# Altium PCB NBP2 Altera Cyclone PQ208 Rev1.02.PcbDoc (part 1 of 2)
Units mm, origin at the board's own origin, x right, y up, seen from the top; angles counter-clockwise.
Board outline 69 x 80.99 mm, 2 copper layers (Top Layer, Bottom Layer); 52 components, 189 nets, 558 pads, 192 vias.
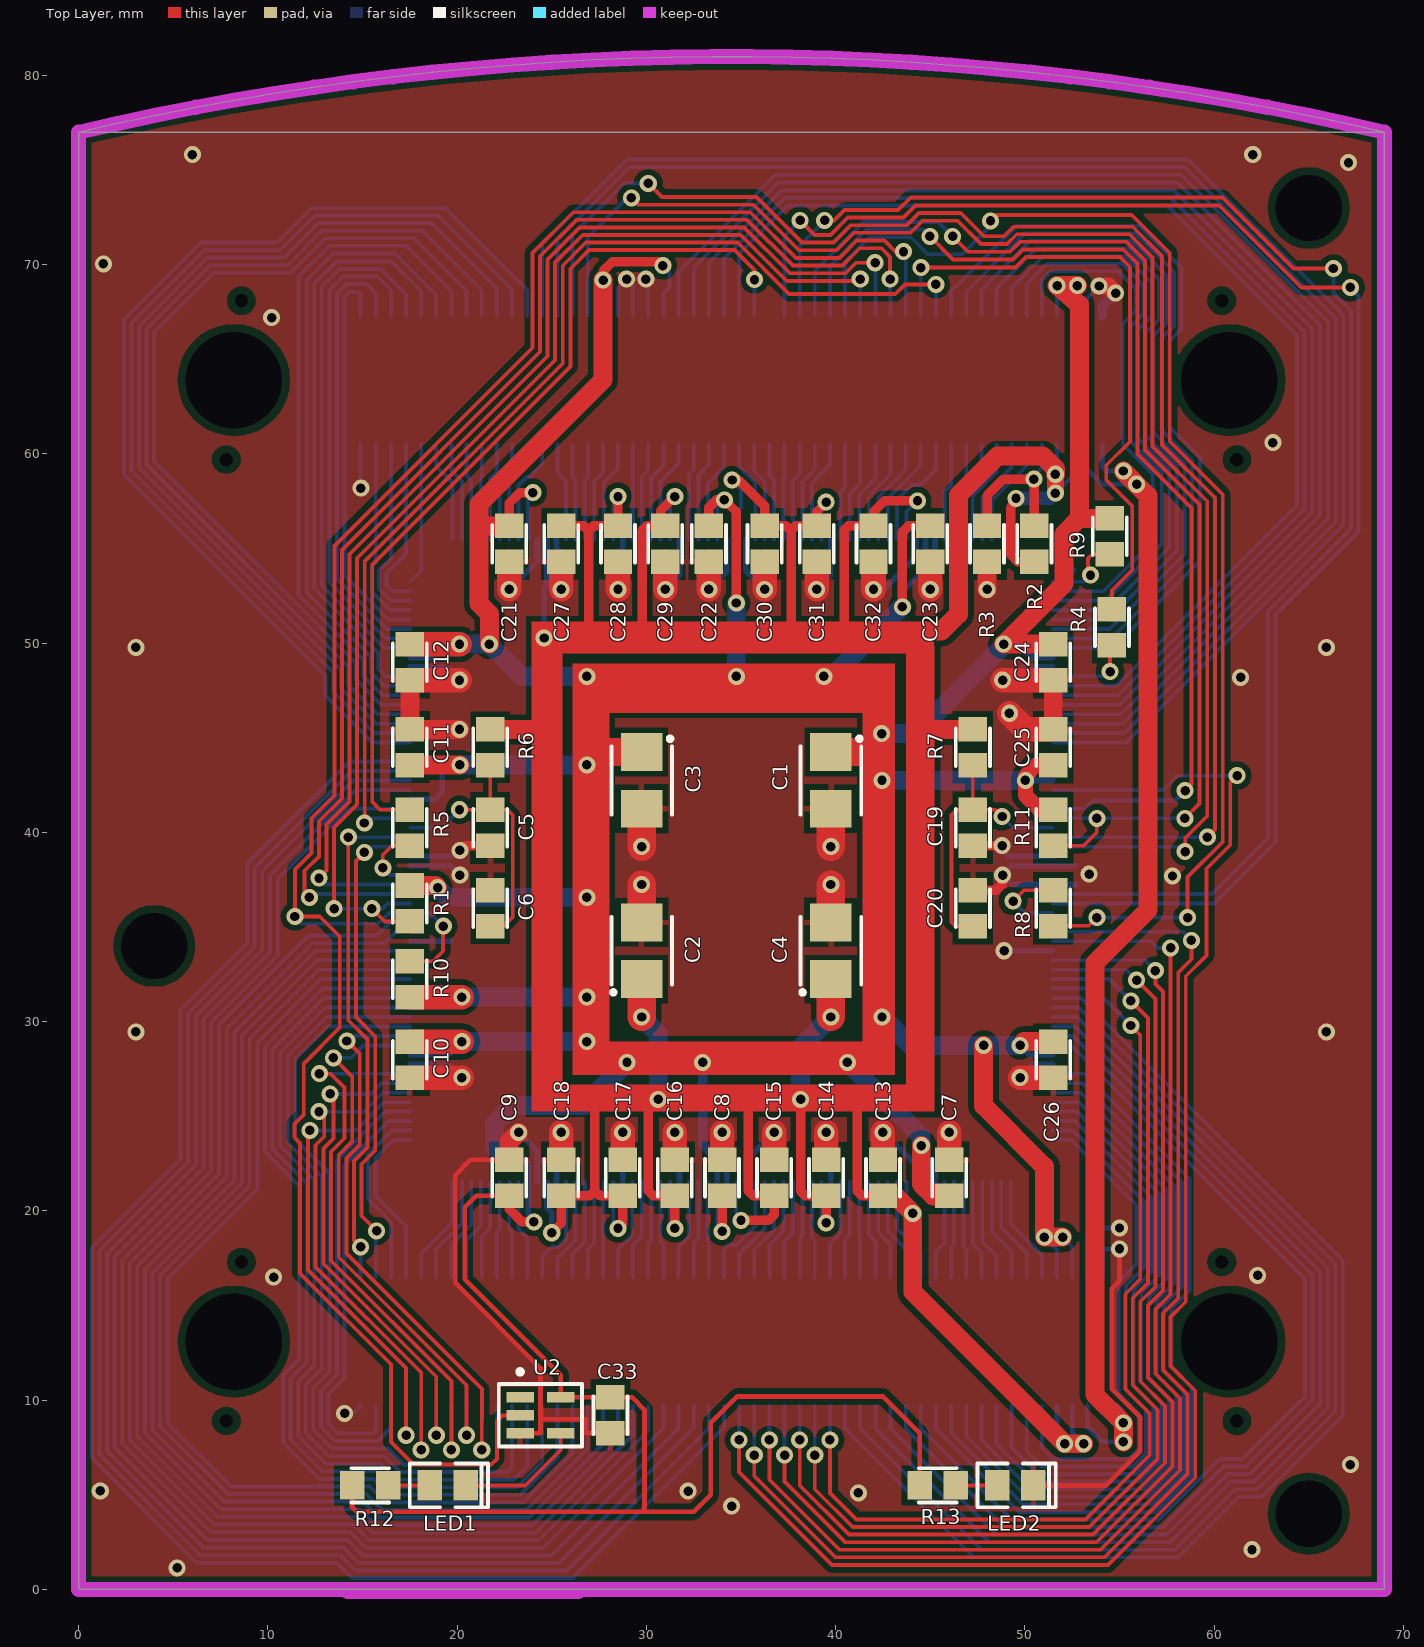
[diagram p0: Top Layer view]
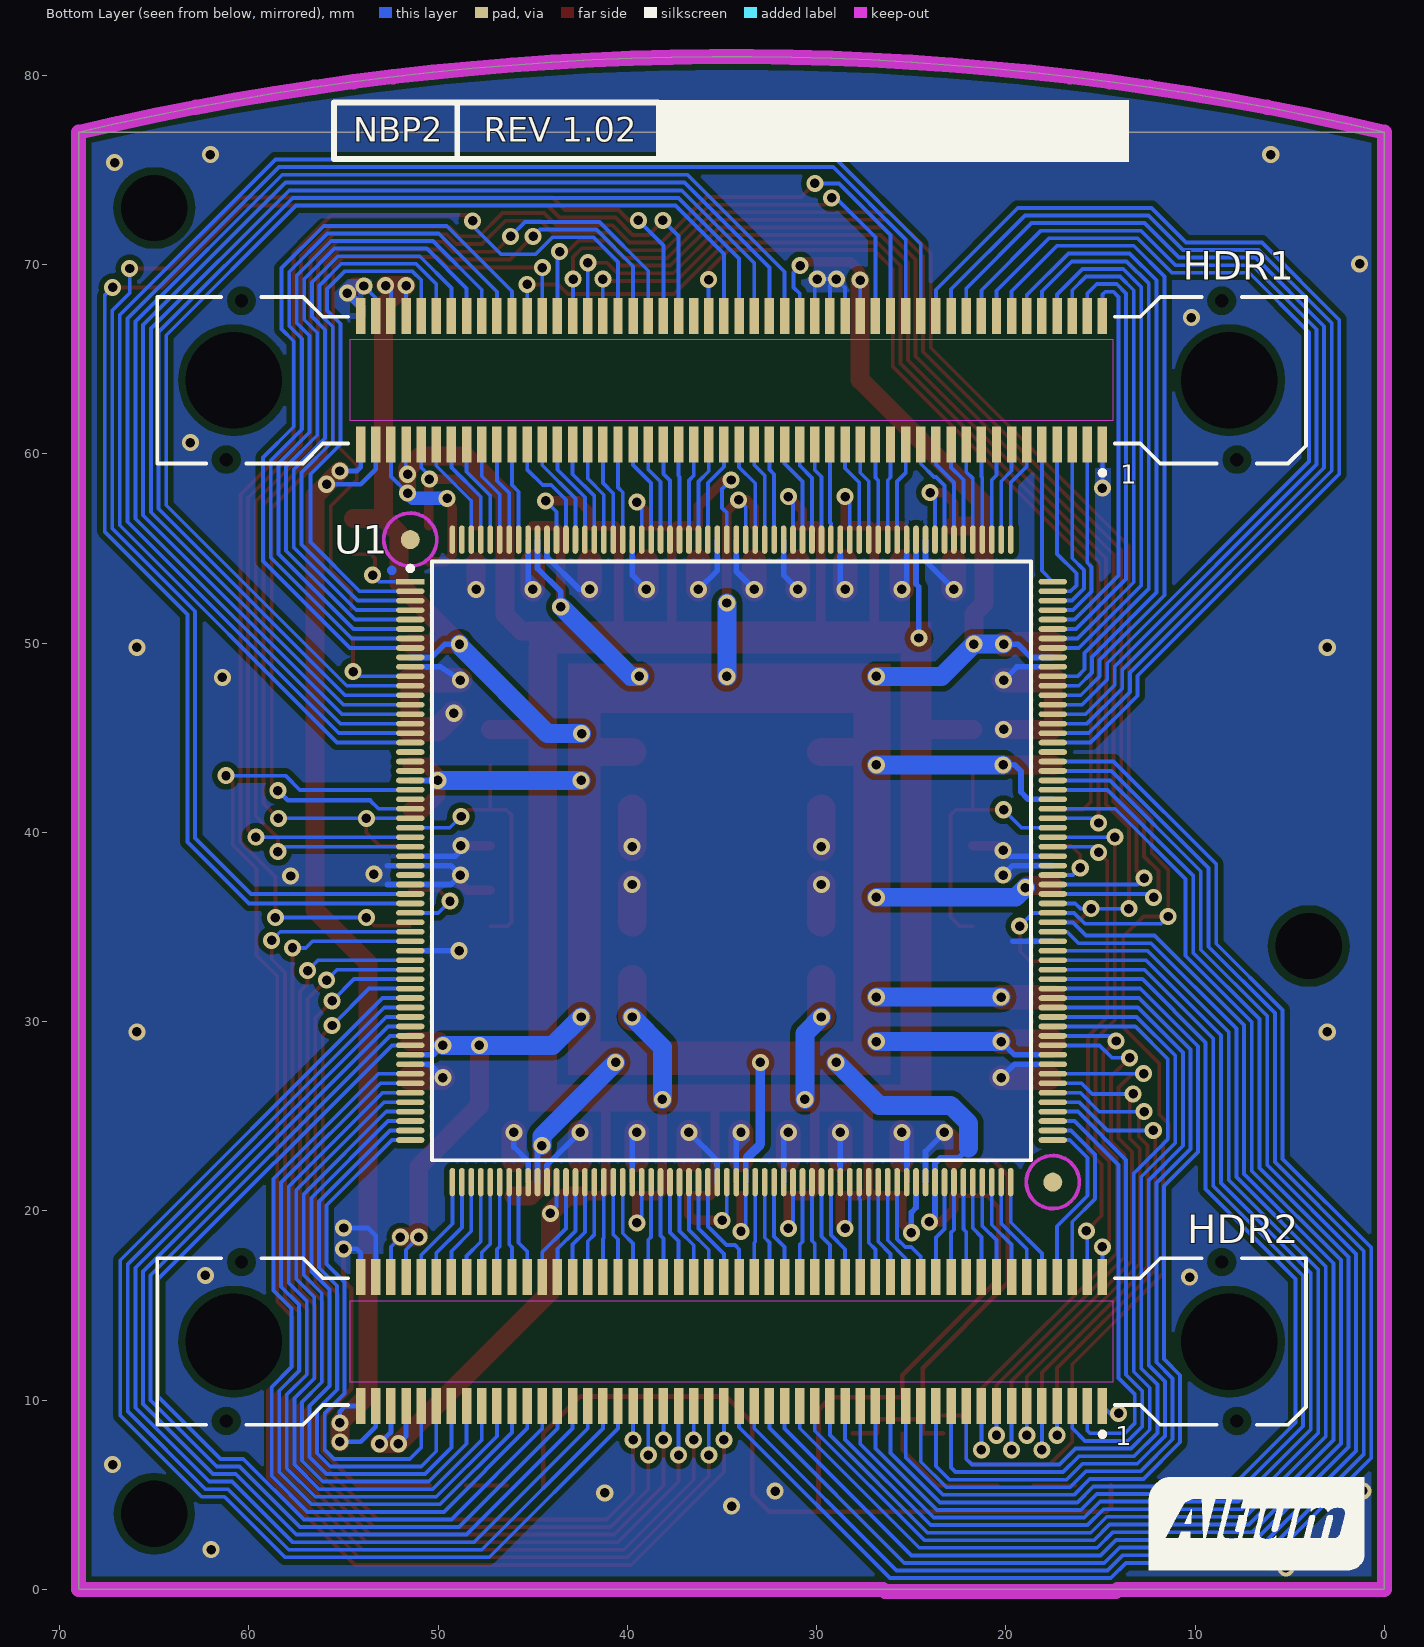
[diagram p1: Bottom Layer view, seen from below]

## Layer stack, top to bottom
Top Layer: signal copper 0.0356
Dielectric: core 0.32, FR-4, Dk 4.8
Bottom Layer: signal copper 0.0356

## Board outline
0,0 0,77 ccw(c0.001,77) 0.001,77 cw(c34.5,-69.801) 0.001,77 69,77 69,0

## Design rules (kind name [scope] priority, off if disabled: settings)
Clearance Clearance_Unplated_Pads [PadIsPlated = 'False'] p1: gap=0.4 // Slightly larger clearance around unplated holes
Clearance Clearance_Polygons [InPolygon] p2: gap=0.3
Clearance [All] p3: gap=0.2
ComponentClearance [All] p1: gap=0.2 collisioncheckmode=3 verticalgap=0.254 showdistances=FALSE
FabricationTestPointUsage TestPointUsage [All] p1 off: valid=0 allowmultiple=FALSE
FabricationTestpoint Testpoint [All] p1 off: side=3 testpointundercomponent=TRUE minsize=1.016 maxsize=2.54 preferedsize=1.524 minholesize=0 maxholesize=1.016 preferedholesize=0.813 testpointgrid=0.025 allowsidetop=TRUE allowsidebottom=TRUE usegrid=TRUE gridtolerance=0
HoleSize [All] p1: absolutevalues=TRUE maxlimit=5.2 minlimit=0.4 maxpercent=80.000 minpercent=20.000
PlaneClearance [All] p1: clearance=0.5
PlaneConnect [All] p1: planeconnectstyle=Relief reliefexpansion=0.5 reliefentries=4 reliefconductorwidth=0.25 reliefairgap=0.25
PolygonConnect PolygonConnect_Satellite_ID_Pads [InPadClass('Satellite ID Pads')] p1: connectstyle=NoConnect reliefconductorwidth=0.254 reliefentries=4 polygonreliefangle="90 Angle"
PolygonConnect [All] p2: connectstyle=Relief reliefconductorwidth=0.3 reliefentries=4 polygonreliefangle="90 Angle"
RoomDefinition BOCD_CycloneEPC12 [InComponentClass('BOCD_CycloneEPC12')] p1 off: confinementstyle=ConfineIn formatcopy=TRUE lockcomponents=FALSE outline 0,0 69,0 69,77 0,77
RoutingVias [All] p1: holewidth=0.5 width=0.9 viastyle="Through Hole" minholewidth=0.5 minwidth=0.9 maxholewidth=0.5 maxwidth=0.9
SMDNeckDown [All] p1: percent=100.000
SilkscreenOverComponentPads [All] p1: minsilkscreentomaskgap=0.254
SolderMaskExpansion SolderMaskExpansion_Vias [Isvia] p1: expansion=-0.46
SolderMaskExpansion [All] p2: expansion=0.1
Width Width_Power_Nets [InNetClass('Power Nets')] p1: maxlimit=2.5 minlimit=0.15 preferedwidth=0.25 toplayer_prefwidth=0.15
Width [All] p2: maxlimit=1.5 minlimit=0.2 preferedwidth=0.2
21 further rules are at their usual default settings.

## Classes and differential pairs
pad class "Satellite ID Pads": HDR1-36 HDR1-38 HDR1-40
net class "Power Nets": 5V GND VCC VCCINT

## Components (designator, comment, footprint, x,y, rotation, side; value= is the part's Value field where it differs from the comment)
C1 "10uF" MCCT-B 39.75,42.75 r270 top
C2 "10uF" MCCT-B 29.75,33.75 r90 top
C3 "10uF" MCCT-B 29.75,42.75 r270 top
C4 "10uF" MCCT-B 39.75,33.75 r90 top
C5 "0.1uF" CC2012-0805 21.75,40.25 r270 top
C6 "0.001uF" CC2012-0805 21.75,36 r90 top
C7 "0.1uF" CC2012-0805 46,21.75 r90 top
C8 "0.1uF" CC2012-0805 34,21.75 r90 top
C9 "0.1uF" CC2012-0805 22.75,21.75 r90 top
C10 "0.1uF" CC2012-0805 17.5,28 r270 top
C11 "0.1uF" CC2012-0805 17.5,44.5 r90 top
C12 "0.1uF" CC2012-0805 17.5,49 r270 top
C13 "0.1uF" CC2012-0805 42.5,21.75 r90 top
C14 "0.1uF" CC2012-0805 39.5,21.75 r90 top
C15 "0.1uF" CC2012-0805 36.75,21.75 r90 top
C16 "0.1uF" CC2012-0805 31.5,21.75 r90 top
C17 "0.1uF" CC2012-0805 28.75,21.75 r90 top
C18 "0.1uF" CC2012-0805 25.5,21.75 r90 top
C19 "0.1uF" CC2012-0805 47.25,40.25 r90 top
C20 "0.001uF" CC2012-0805 47.25,36 r270 top
C21 "0.1uF" CC2012-0805 22.75,55.25 r90 top
C22 "0.1uF" CC2012-0805 33.3,55.25 r90 top
C23 "0.1uF" CC2012-0805 45,55.25 r90 top
C24 "0.1uF" CC2012-0805 51.5,49 r90 top
C25 "0.1uF" CC2012-0805 51.5,44.5 r270 top
C26 "0.1uF" CC2012-0805 51.5,28 r90 top
C27 "0.1uF" CC2012-0805 25.5,55.25 r90 top
C28 "0.1uF" CC2012-0805 28.5,55.25 r90 top
C29 "0.1uF" CC2012-0805 31,55.25 r90 top
C30 "0.1uF" CC2012-0805 36.25,55.25 r90 top
C31 "0.1uF" CC2012-0805 39,55.25 r90 top
C32 "0.1uF" CC2012-0805 42,55.25 r90 top
C33 "0.1uF" CC2012-0805 28.1,9.2 r270 top
HDR1 "54075-1009" 54075 34.5,63.9 r0 bottom locked
HDR2 "54075-1009" 54075 34.5,13.1 r0 bottom locked
LED1 "HSMG-C170" "SMD _LED" 19.5,5.5 r180 top locked
LED2 "HSMH-C170" "SMD _LED" 49.5,5.5 r180 top locked
R1 "4K7" CC2012-0805 17.5,36.25 r270 top
R2 "DO NOT INSTALL" CC2012-0805 50.5,55.25 r90 top
R3 "47R" CC2012-0805 48,55.25 r270 top
R4 "100R" CC2012-0805 54.6,50.85 r90 top
R5 "100R" CC2012-0805 17.5,40.25 r270 top
R6 "1R" CC2012-0805 21.75,44.5 r270 top
R7 "1R" CC2012-0805 47.25,44.5 r270 top
R8 "33R" CC2012-0805 51.5,36 r270 top
R9 "4K7" CC2012-0805 54.483,55.651 r270 top
R10 "4K7" CC2012-0805 17.5,32.25 r90 top
R11 "4K7" CC2012-0805 51.5,40.25 r270 top
R12 "270R" CC2012-0805 15.4,5.5 r0 top
R13 "270R" CC2012-0805 45.4,5.5 r0 top
U1 "Cyclone EP1C12Q240C8" F-QFP32X32-G240/P.5N(RS) 34.5,38.5 r180 bottom locked
U2 "SN74LVC1G04DBV" SO-G5/P.95 24.4,9.2 r270 top

## Footprints (in the part's own frame and the unit in brackets; to place one, negate y for a bottom-side part, rotate by r counter-clockwise, add the part's x,y. Pads: shape width x height; smd on the part's side, far side on the other; paste and mask are expansions set on the pad)
54075 [mm] "Connector; Docking Station, Receptacle; 100 Position; Vertical"
  rect 0.5x1.9 smd: 1(-19.6,3.4) 2(-19.6,-3.4) 3(-18.8,3.4) 4(-18.8,-3.4) 5(-18,3.4) 6(-18,-3.4) 7(-17.2,3.4) 8(-17.2,-3.4) 9(-16.4,3.4) 10(-16.4,-3.4) 11(-15.6,3.4) 12(-15.6,-3.4) 13(-14.8,3.4) 14(-14.8,-3.4) 15(-14,3.4) 16(-14,-3.4) 17(-13.2,3.4) 18(-13.2,-3.4) 19(-12.4,3.4) 20(-12.4,-3.4) 21(-11.6,3.4) 22(-11.6,-3.4) 23(-10.8,3.4) 24(-10.8,-3.4) 25(-10,3.4) 26(-10,-3.4) 27(-9.2,3.4) 28(-9.2,-3.4) 29(-8.4,3.4) 30(-8.4,-3.4) 31(-7.6,3.4) 32(-7.6,-3.4) 33(-6.8,3.4) 34(-6.8,-3.4) 35(-6,3.4) 36(-6,-3.4) 37(-5.2,3.4) 38(-5.2,-3.4) 39(-4.4,3.4) 40(-4.4,-3.4) 41(-3.6,3.4) 42(-3.6,-3.4) 43(-2.8,3.4) 44(-2.8,-3.4) 45(-2,3.4) 46(-2,-3.4) 47(-1.2,3.4) 48(-1.2,-3.4) 49(-0.4,3.4) 50(-0.4,-3.4) 51(0.4,3.4) 52(0.4,-3.4) 53(1.2,3.4) 54(1.2,-3.4) 55(2,3.4) 56(2,-3.4) 57(2.8,3.4) 58(2.8,-3.4) 59(3.6,3.4) 60(3.6,-3.4) 61(4.4,3.4) 62(4.4,-3.4) 63(5.2,3.4) 64(5.2,-3.4) 65(6,3.4) 66(6,-3.4) 67(6.8,3.4) 68(6.8,-3.4) 69(7.6,3.4) 70(7.6,-3.4) 71(8.4,3.4) 72(8.4,-3.4) 73(9.2,3.4) 74(9.2,-3.4) 75(10,3.4) 76(10,-3.4) 77(10.8,3.4) 78(10.8,-3.4) 79(11.6,3.4) 80(11.6,-3.4) 81(12.4,3.4) 82(12.4,-3.4) 83(13.2,3.4) 84(13.2,-3.4) 85(14,3.4) 86(14,-3.4) 87(14.8,3.4) 88(14.8,-3.4) 89(15.6,3.4) 90(15.6,-3.4) 91(16.4,3.4) 92(16.4,-3.4) 93(17.2,3.4) 94(17.2,-3.4) 95(18,3.4) 96(18,-3.4) 97(18.8,3.4) 98(18.8,-3.4) 99(19.6,3.4) 100(19.6,-3.4)
  round 0.5 hole 0.7 unplated: MH1(-26.7,4.2) MH2(-25.9,-4.2) MH3(26.7,4.2) MH4(25.9,-4.2)
  round 4.8 hole 5.1 unplated: MH5(-26.3,0) MH6(26.3,0)
  Top Layer keep-out region: -20.15,2.15 20.15,2.15 20.15,-2.15 -20.15,-2.15
  silkscreen extent -30.35,-4.4 30.35,5.02
CC2012-0805 [mm]
  rect 1.3x1.5 smd: 1(-0.95,0) 2(0.95,0)
  silkscreen extent -1,-0.9 1,0.9
F-QFP32X32-G240/P.5N(RS) [mm]
  rect 1.5x0.3 smd: 1(-16.975,14.75)
  oval 1.5x0.3 smd: 2(-16.975,14.25) 3(-16.975,13.75) 4(-16.975,13.25) 5(-16.975,12.75) 6(-16.975,12.25) 7(-16.975,11.75) 8(-16.975,11.25) 9(-16.975,10.75) 10(-16.975,10.25) 11(-16.975,9.75) 12(-16.975,9.25) 13(-16.975,8.75) 14(-16.975,8.25) 15(-16.975,7.75) 16(-16.975,7.25) 17(-16.975,6.75) 18(-16.975,6.25) 19(-16.975,5.75) 20(-16.975,5.25) 21(-16.975,4.75) 22(-16.975,4.25) 23(-16.975,3.75) 24(-16.975,3.25) 25(-16.975,2.75) 26(-16.975,2.25) 27(-16.975,1.75) 28(-16.975,1.25) 29(-16.975,0.75) 30(-16.975,0.25) 31(-16.975,-0.25) 32(-16.975,-0.75) 33(-16.975,-1.25) 34(-16.975,-1.75) 35(-16.975,-2.25) 36(-16.975,-2.75) 37(-16.975,-3.25) 38(-16.975,-3.75) 39(-16.975,-4.25) 40(-16.975,-4.75) 41(-16.975,-5.25) 42(-16.975,-5.75) 43(-16.975,-6.25) 44(-16.975,-6.75) 45(-16.975,-7.25) 46(-16.975,-7.75) 47(-16.975,-8.25) 48(-16.975,-8.75) 49(-16.975,-9.25) 50(-16.975,-9.75) 51(-16.975,-10.25) 52(-16.975,-10.75) 53(-16.975,-11.25) 54(-16.975,-11.75) 55(-16.975,-12.25) 56(-16.975,-12.75) 57(-16.975,-13.25) 58(-16.975,-13.75) 59(-16.975,-14.25) 60(-16.975,-14.75) 121(16.975,-14.75) 122(16.975,-14.25) 123(16.975,-13.75) 124(16.975,-13.25) 125(16.975,-12.75) 126(16.975,-12.25) 127(16.975,-11.75) 128(16.975,-11.25) 129(16.975,-10.75) 130(16.975,-10.25) 131(16.975,-9.75) 132(16.975,-9.25) 133(16.975,-8.75) 134(16.975,-8.25) 135(16.975,-7.75) 136(16.975,-7.25) 137(16.975,-6.75) 138(16.975,-6.25) 139(16.975,-5.75) 140(16.975,-5.25) 141(16.975,-4.75) 142(16.975,-4.25) 143(16.975,-3.75) 144(16.975,-3.25) 145(16.975,-2.75) 146(16.975,-2.25) 147(16.975,-1.75) 148(16.975,-1.25) 149(16.975,-0.75) 150(16.975,-0.25) 151(16.975,0.25) 152(16.975,0.75) 153(16.975,1.25) 154(16.975,1.75) 155(16.975,2.25) 156(16.975,2.75) 157(16.975,3.25) 158(16.975,3.75) 159(16.975,4.25) 160(16.975,4.75) 161(16.975,5.25) 162(16.975,5.75) 163(16.975,6.25) 164(16.975,6.75) 165(16.975,7.25) 166(16.975,7.75) 167(16.975,8.25) 168(16.975,8.75) 169(16.975,9.25) 170(16.975,9.75) 171(16.975,10.25) 172(16.975,10.75) 173(16.975,11.25) 174(16.975,11.75) 175(16.975,12.25) 176(16.975,12.75) 177(16.975,13.25) 178(16.975,13.75) 179(16.975,14.25) 180(16.975,14.75)
  oval 0.3x1.5 smd: 61(-14.75,-16.975) 62(-14.25,-16.975) 63(-13.75,-16.975) 64(-13.25,-16.975) 65(-12.75,-16.975) 66(-12.25,-16.975) 67(-11.75,-16.975) 68(-11.25,-16.975) 69(-10.75,-16.975) 70(-10.25,-16.975) 71(-9.75,-16.975) 72(-9.25,-16.975) 73(-8.75,-16.975) 74(-8.25,-16.975) 75(-7.75,-16.975) 76(-7.25,-16.975) 77(-6.75,-16.975) 78(-6.25,-16.975) 79(-5.75,-16.975) 80(-5.25,-16.975) 81(-4.75,-16.975) 82(-4.25,-16.975) 83(-3.75,-16.975) 84(-3.25,-16.975) 85(-2.75,-16.975) 86(-2.25,-16.975) 87(-1.75,-16.975) 88(-1.25,-16.975) 89(-0.75,-16.975) 90(-0.25,-16.975) 91(0.25,-16.975) 92(0.75,-16.975) 93(1.25,-16.975) 94(1.75,-16.975) 95(2.25,-16.975) 96(2.75,-16.975) 97(3.25,-16.975) 98(3.75,-16.975) 99(4.25,-16.975) 100(4.75,-16.975) 101(5.25,-16.975) 102(5.75,-16.975) 103(6.25,-16.975) 104(6.75,-16.975) 105(7.25,-16.975) 106(7.75,-16.975) 107(8.25,-16.975) 108(8.75,-16.975) 109(9.25,-16.975) 110(9.75,-16.975) 111(10.25,-16.975) 112(10.75,-16.975) 113(11.25,-16.975) 114(11.75,-16.975) 115(12.25,-16.975) 116(12.75,-16.975) 117(13.25,-16.975) 118(13.75,-16.975) 119(14.25,-16.975) 120(14.75,-16.975) 181(14.75,16.975) 182(14.25,16.975) 183(13.75,16.975) 184(13.25,16.975) 185(12.75,16.975) 186(12.25,16.975) 187(11.75,16.975) 188(11.25,16.975) 189(10.75,16.975) 190(10.25,16.975) 191(9.75,16.975) 192(9.25,16.975) 193(8.75,16.975) 194(8.25,16.975) 195(7.75,16.975) 196(7.25,16.975) 197(6.75,16.975) 198(6.25,16.975) 199(5.75,16.975) 200(5.25,16.975) 201(4.75,16.975) 202(4.25,16.975) 203(3.75,16.975) 204(3.25,16.975) 205(2.75,16.975) 206(2.25,16.975) 207(1.75,16.975) 208(1.25,16.975) 209(0.75,16.975) 210(0.25,16.975) 211(-0.25,16.975) 212(-0.75,16.975) 213(-1.25,16.975) 214(-1.75,16.975) 215(-2.25,16.975) 216(-2.75,16.975) 217(-3.25,16.975) 218(-3.75,16.975) 219(-4.25,16.975) 220(-4.75,16.975) 221(-5.25,16.975) 222(-5.75,16.975) 223(-6.25,16.975) 224(-6.75,16.975) 225(-7.25,16.975) 226(-7.75,16.975) 227(-8.25,16.975) 228(-8.75,16.975) 229(-9.25,16.975) 230(-9.75,16.975) 231(-10.25,16.975) 232(-10.75,16.975) 233(-11.25,16.975) 234(-11.75,16.975) 235(-12.25,16.975) 236(-12.75,16.975) 237(-13.25,16.975) 238(-13.75,16.975) 239(-14.25,16.975) 240(-14.75,16.975)
  round 1 smd paste-0.51 mask+1: FID1(-16.975,16.975) FID2(16.975,-16.975)
  Top Layer circle w0.25: c-17.951,15.348 r0.125
  Top Layer keep-out circle w0.2: c-16.975,16.975 r1.4
  Top Layer keep-out circle w0.2: c16.975,-16.975 r1.4
  silkscreen extent -17.1,-15.83 15.83,15.83
MCCT-B [mm]
  rect 2x2.2 smd: 1(-1.5,0) 2(1.5,0)
  silkscreen extent -2.3,-1.6 1.8,1.6
"SMD _LED" [mm]
  rect 1.3x1.6 smd: 1(0.95,0) 2(-0.95,0)
  silkscreen extent -2.13,-1.15 2,1.15
SO-G5/P.95 [mm]
  rect 0.55x1.45 smd: 1(-0.95,-1.075) 2(0,-1.075) 3(0.95,-1.075) 4(0.95,1.075) 5(-0.95,1.075)
  silkscreen extent -2.42,-2.2 1.65,2.2

## Part data
C1 C2 C3 C4: library part CAP_POLAR, "Polar Capacitor"
C5 C6 C7 C8 C9 C10 C11 C12 C13 C14 C15 C16 C17 C18 C19 C20 C21 C22 C23 C24 C25 C26 C27 C28 C29 C30 C31 C32 C33: library part CAP, "Capacitor"
HDR1 HDR2: "Board-to-Board, Docking Station, 0.80mm (.031\") Pitch, Shielded Receptacle, Vertical, Ultra Low Profile, SMT"
LED1 LED2: library part HSMX-C670, "Typical RED GaAs SMD LED Agilent make"
R1 R2 R3 R4 R5 R6 R7 R8 R9 R10 R11 R12 R13: library part RES, "Resistor"
U1: library part EP1C12Q240C6_ALT, "Cyclone Family, 1.5V FPGA, 173 I/O Pins, 2 x PLLs, Commercial Grade, Speed Grade 6"
U2: library part SN74AHC1G04DBVR

## Free pads (board coordinates)
  round 3.2 hole 3.5 unplated: LP(4,34) LP(65,4) LP(65,73)

## Via types
v1: diameter 0.9, hole 0.5, Top Layer to Bottom Layer, 192 vias

## Nets (pads, with @x,y where several pads share a name; then routed paths per layer and width w, separated by ;. In a path a pad name is that pad's centre, name@x,y a point inside that pad or via, vN(x,y) a via of type N, cw(c..) or ccw(c..) an arc to the next point about the centre after c; other vN are vias at no path point)
5V: HDR1.97 HDR1.99 HDR2.97 HDR2.99 | length 65.4
  Top Layer w1: v1(55.2,7.8) v1(55.2,8.8) 53.7,10.3 53.7,33.1 56.5,35.9 56.5,57.8 v1(55.2,59.1)
  Bottom Layer w0.25: HDR2.97@53.3,9.7 53.3,8.6 54.1,7.8 v1(55.2,7.8) ; HDR1.97@53.3,60.5 53.3,59.2 54.1,58.4 v1(55.9,58.4) ; HDR2.99@54.1,9.7 54.9,9.7 55.2,9.4 v1(55.2,8.8) ; HDR1.99@54.1,60.5 54.1,59.3 54.3,59.1 v1(55.2,59.1)
AUDIO_SPI_CSN: HDR1.11 U1.181 | length 5.4
  Bottom Layer w0.2: HDR1.11@18.9,60.5 18.9,59.346 19.75,58.496 U1.181@19.75,55.475
BLUE0: HDR1.14 U1.168 | length 36.5
  Bottom Layer w0.2: U1.168@17.525,47.25 16.05,47.25 15.05,48.25 15.05,49.109 11.625,52.534 11.625,69.375 13.25,71 17.3,71 19.7,68.6 HDR1.14@19.7,67.3
BLUE1: HDR1.16 U1.167 | length 47.2
  Bottom Layer w0.2: U1.167@17.525,46.75 15.975,46.75 14.65,48.075 14.65,48.944 3.988,59.606 3.988,66.422 7.141,69.575 11.225,69.575 13.05,71.4 17.725,71.4 20.5,68.625 HDR1.16@20.5,67.3
BOC_CTS: HDR1.13 U1.182 | length 5.3
  Bottom Layer w0.2: HDR1.13@19.7,60.5 19.7,59.112 20.25,58.561 U1.182@20.25,55.475
BOC_RTS: HDR1.17 U1.184 | length 5
  Bottom Layer w0.2: U1.184@21.25,55.475 21.25,58.751 21.3,58.801 HDR1.17@21.3,60.5
BOC_RX: HDR1.19 U1.185 | length 5.2
  Bottom Layer w0.2: U1.185@21.75,55.475 21.75,58.705 22.1,59.055 HDR1.19@22.1,60.5
BOC_TX: HDR1.15 U1.183 | length 5.1
  Bottom Layer w0.2: HDR1.15@20.5,60.5 20.5,58.877 20.75,58.627 U1.183@20.75,55.475
BUZZER: HDR2.24 U1.113 | length 5.2
  Bottom Layer w0.2: U1.113@23.25,21.525 23.25,19.05 23.7,18.6 HDR2.24@23.7,16.5
CAN_RXD: HDR1.4 U1.175 | length 23.7
  Bottom Layer w0.2: HDR1.4@15.7,67.3 15.7,68.475 15.2,68.975 14.15,68.975 13.65,68.475 13.65,53.4 16.3,50.75 U1.175@17.525,50.75
CAN_TXD: HDR1.2 U1.176 | length 21.3
  Bottom Layer w0.2: HDR1.2@14.9,67.3 14.9,68.425 14.75,68.575 14.325,68.575 14.05,68.3 14.05,53.575 16.375,51.25 U1.176@17.525,51.25
FPGA_AUX0: HDR1.86 U1.5 | length 35
  Bottom Layer w0.2: HDR1.86@48.5,67.3 48.5,68.75 50.6,70.85 55.475,70.85 57.075,69.25 57.075,67.092 56.388,66.405 56.388,60.99 58.039,59.339 58.039,54.889 54.4,51.25 U1.5@51.475,51.25
FPGA_AUX1: HDR1.88 U1.4 | length 32.6
  Bottom Layer w0.2: HDR1.88@49.3,67.3 49.3,68.775 50.975,70.45 55.3,70.45 56.675,69.075 56.675,67.258 55.982,66.565 55.982,60.831 57.633,59.18 57.633,55.052 54.331,51.75 U1.4@51.475,51.75
FPGA_AUX2: HDR1.90 U1.3 | length 30.4
  Bottom Layer w0.2: HDR1.90@50.1,67.3 50.1,68.975 51.175,70.05 55.125,70.05 56.275,68.9 56.275,67.424 55.575,66.724 55.575,60.672 57.226,59.021 57.226,55.22 54.257,52.25 U1.3@51.475,52.25
FPGA_AUX3: HDR1.92 U1.2 | length 28.1
  Bottom Layer w0.2: HDR1.92@50.9,67.3 50.9,69.2 51.35,69.65 54.95,69.65 55.875,68.725 55.875,67.589 55.169,66.883 55.169,60.512 56.751,58.93 56.751,55.348 54.153,52.75 U1.2@51.475,52.75
FPGA_CCLK: HDR1.66 R8.2 | length 67.1
  Top Layer w0.2: v1(48.184,72.314) 48.497,72.627 55.643,72.627 57.65,70.62 57.65,60.655 60.452,57.853 60.452,39.497 58.6,37.645 v1(58.6,35.5) ; R8.2@51.5,35.05 51.525,35.075 53.375,35.075 v1(53.8,35.5)
  Bottom Layer w0.2: HDR1.66@40.5,67.3 40.5,70.153 41.797,71.451 43.967,71.451 44.861,70.557 46.685,70.557 48.184,72.056 v1(48.184,72.314) ; v1(53.8,35.5) v1(58.6,35.5)
FPGA_CCLK#: R8.1 U1.36 | length 4.7
  Top Layer w0.2: v1(49.378,36.373) 49.955,36.95 R8.1@51.5,36.95
  Bottom Layer w0.2: v1(49.378,36.373) 50,35.75 U1.36@51.475,35.75
FPGA_CLK: HDR2.2 U1.153 | length 27.4
  Top Layer w0.2: v1(14.25,39.75) 14.25,30.08 15.265,29.064 15.265,23.354 14.548,22.637 14.548,18.452 v1(14.9,18.1)
  Bottom Layer w0.2: v1(14.25,39.75) U1.153@17.525,39.75 ; HDR2.2@14.9,16.5 v1(14.9,18.1)
FPGA_CLK_1: HDR1.30 U1.28 | length 80
  Top Layer w0.2: v1(30.099,74.295) 30.823,73.571 35.818,73.571 38.218,71.171 39.885,71.171 40.805,72.091 43.77,72.091 44.406,72.727 46.609,72.727 47.835,71.501 48.895,71.501 49.403,72.009 55.695,72.009 57.25,70.454 57.25,60.479 60.046,57.683 60.046,40.157 v1(59.639,39.751)
  Bottom Layer w0.2: HDR1.30@26.1,67.3 26.1,71.569 28.244,73.712 28.826,74.295 v1(30.099,74.295) ; U1.28@51.475,39.75 v1(59.639,39.751) v1(59.639,39.751)
FPGA_CLK_2: HDR1.32 U1.29 | length 78.1
  Top Layer w0.2: v1(29.21,73.533) 29.572,73.171 35.652,73.171 38.058,70.764 40.044,70.764 40.971,71.691 43.954,71.691 44.59,72.327 46.444,72.327 47.681,71.09 49.05,71.09 49.569,71.609 55.53,71.609 56.75,70.389 56.75,60.395 59.639,57.506 59.639,40.869 58.471,39.7 v1(58.471,38.989)
  Bottom Layer w0.2: HDR1.32@26.9,67.3 26.9,71.45 28.983,73.533 v1(29.21,73.533) ; U1.29@51.475,39.25 58.21,39.25 v1(58.471,38.989)
FPGA_DIN: HDR1.64 U1.25 | length 57.4
  Top Layer w0.2: v1(44.983,71.501) 46.203,70.282 49.373,70.282 49.9,70.809 55.198,70.809 55.95,70.057 55.95,60.001 58.801,57.15 58.801,42.545 v1(58.471,42.215)
  Bottom Layer w0.2: HDR1.64@39.7,67.3 39.7,69.919 41.639,71.858 44.627,71.858 v1(44.983,71.501) ; U1.25@51.475,41.25 53.15,41.25 53.598,41.698
  Bottom Layer w0.23: 53.598,41.698 57.954,41.698 v1(58.471,42.215)
FPGA_DONE: HDR1.74 R10.2 U1.145 U2.2 | length 119.8
  Top Layer w0.2: R10.2@17.5,33.2 18.725,33.2 19.25,33.725 19.25,35.025 v1(19.275,35.05) ; U2.2@23.325,9.2 22.4,9.2 22.1,8.9 22.1,6.9 21.8,6.6 17.7,6.6 16.5,7.8 16.5,11.9 11.7,16.7 11.7,23.6 11.4,23.9 11.4,24.6 11.9,25.1 11.9,27.8 13.8,29.7 13.8,34.5 12.74,35.56 v1(11.43,35.56) 11.43,38.049 12.3,38.919 12.3,40.756 13.513,41.969 13.513,55.144 23.978,65.608 23.978,70.612 26.137,72.771 35.486,72.771 37.899,70.358 40.203,70.358 41.118,71.272 42.577,71.272 43.161,70.688 v1(43.586,70.688)
  Bottom Layer w0.2: v1(11.43,35.56) 11.811,35.179 15.829,35.179 16.4,35.75 18.575,35.75 v1(19.275,35.05) ; v1(43.586,70.688) 43.7,70.548 HDR1.74@43.7,67.3
FPGA_INIT: HDR1.68 R1.2 U1.146 | length 65.2
  Top Layer w0.2: v1@13.487,35.966 v1@13.487,35.975 ; v1(13.5,35.975) 13.5,40.259 14.713,41.472 14.713,54.489 25.178,64.954 25.178,70.115 26.634,71.571 34.989,71.571 37.421,69.139 41.199,69.139 v1(41.3,69.24) ; v1(15.5,35.975) 16.175,35.3 R1.2@17.5,35.3
  Bottom Layer w0.2: v1@13.496,35.975 16.059,35.975 16.334,36.25 U1.146@17.525,36.25 U1.146@17.5,36.225 ; v1@15.491,35.966 v1(15.5,35.975) ; HDR1.68@41.3,67.3 v1(41.3,69.24)
FPGA_M0: HDR1.60 U1.34 | length 79.4
  Top Layer w0.2: v1(39.421,72.339) 39.922,72.339 40.474,72.891 43.3,72.891 43.967,73.558 60.442,73.558 64.2,69.8 v1(66.3,69.8)
  Bottom Layer w0.2: HDR1.60@38.1,67.3 38.1,71.018 v1(39.421,72.339) ; U1.34@51.475,36.75 59.889,36.75 62.846,39.707 62.846,51.689 67.225,56.068 67.225,67.575 66.3,68.5 v1(66.3,69.8)
FPGA_M1: HDR1.58 U1.35 | length 81.6
  Top Layer w0.2: v1(38.125,72.339) 38.887,71.577 39.726,71.577 40.639,72.491 43.586,72.491 44.221,73.127 60.273,73.127 64.6,68.8 v1(67.2,68.8)
  Bottom Layer w0.2: HDR1.58@37.3,67.3 37.3,71.514 v1(38.125,72.339) ; U1.35@51.475,36.25 59.999,36.25 63.246,39.497 63.246,51.523 67.625,55.902 67.625,68.375 v1(67.2,68.8)
FPGA_PROGRAM: HDR1.62 R11.2 U1.26 | length 63.5
  Top Layer w0.2: v1(46.177,71.501) 46.99,70.688 49.214,70.688 49.734,71.209 55.364,71.209 56.35,70.223 56.35,60.211 59.233,57.328 59.233,41.533 v1(58.45,40.75) ; R11.2@51.5,39.3 53.1,39.3 53.8,40 v1(53.8,40.75)
  Bottom Layer w0.2: HDR1.62@38.9,67.3 38.9,69.685 41.478,72.263 45.415,72.263 v1(46.177,71.501) ; U1.26@51.475,40.75 v1(53.8,40.75) v1(58.45,40.75)
FPGA_TCK: HDR1.72 U1.147 | length 68.6
  Top Layer w0.2: v1(12.192,36.576) 11.938,36.83 11.938,37.973 12.7,38.735 12.7,40.59 13.913,41.803 13.913,54.934 24.378,65.399 24.378,70.447 26.302,72.371 35.32,72.371 37.74,69.952 40.363,69.952 41.277,70.866 42.418,70.866 42.875,70.409 v1(42.875,69.24)
  Bottom Layer w0.2: v1(12.192,36.576) v1@12.366,36.75 ; v1@12.239,36.75 U1.147@17.525,36.75 ; v1(42.875,69.24) HDR1.72@42.9,67.3
FPGA_TDI: HDR1.78 U1.155 | length 59.5
  Top Layer w0.2: v1(15.1,40.5) 15.113,40.513 15.113,54.312 25.578,64.777 25.578,69.949 26.799,71.171 34.823,71.171 37.541,68.453 43.155,68.453 43.663,68.961 v1(45.3,68.961)
  Bottom Layer w0.2: v1(15.1,40.5) 15.35,40.75 U1.155@17.525,40.75 ; HDR1.78@45.3,67.3 v1(45.3,68.961)
FPGA_TDO: HDR1.54 R5.1 | length 47.7
  Top Layer w0.2: R5.1@17.5,41.2 15.925,41.2 15.519,41.605 15.519,54.153 25.984,64.618 25.984,69.79 26.965,70.771 34.658,70.771 35.712,69.716 v1(35.712,69.215)
  Bottom Layer w0.2: HDR1.54@35.7,67.3 v1(35.712,69.215)
FPGA_TDO#: R5.2 U1.149 | length 3.9
  Top Layer w0.2: v1(16.075,38.125) 16.075,38.825 16.55,39.3 R5.2@17.5,39.3
  Bottom Layer w0.2: v1(16.075,38.125) 16.45,37.75 U1.149@17.525,37.75
FPGA_TMS: HDR1.70 U1.148 | length 64.7
  Top Layer w0.2: v1(12.7,37.592) 13.1,37.992 13.1,40.425 14.313,41.638 14.313,54.699 24.778,65.164 24.778,70.281 26.468,71.971 35.155,71.971 37.581,69.545 40.522,69.545 41.081,70.104 v1(42.088,70.104)
  Bottom Layer w0.2: v1(12.7,37.592) 13.042,37.25 U1.148@17.525,37.25 ; v1(42.088,70.104) 42.1,70.092 HDR1.70@42.1,67.3
GND: C1.2 C2.2 C3.2 C4.2 C5.2 C6.2 C7.2 C8.2 C9.2 C10.2 C11.2 C12.2 C13.2 C14.2 C15.2 C16.2 C17.2 C18.2 C19.1 C20.1 C21.1 C22.1 C23.1 C24.1 C25.1 C26.1 C27.1 C28.1 C29.1 C30.1 C31.1 C32.1 C33.2 HDR1.1 HDR1.36 HDR1.38 HDR1.40 HDR1.98 HDR1.100 HDR2.1 HDR2.98 HDR2.100 LED2.2 R3.2 U1.10 U1.30 U1.31 U1.33 U1.40 U1.52 U1.69 U1.71 U1.80 U1.89 U1.91 U1.96 U1.102 U1.109 U1.111 U1.129 U1.142 U1.150 U1.151 U1.171 U1.190 U1.192 U1.199 U1.205 U1.210 U1.212 U1.221 U1.230 U1.232 U2.3 | length 210.3
  Top Layer w0.25: C9.2@22.75,22.7 20.7,22.7 19.9,21.9 19.9,16.2 24.4,11.7 24.4,8.25 U2.3@23.325,8.25 ; 24.4,9 26.8,9 26.8,8.25 C33.2@28.1,8.25 ; LED2.2@50.45,5.5 54.3,5.5 56.1,7.3 56.1,9.1 54.6,10.6 54.6,15.9 55,16.3 v1(55,18)
  Top Layer w0.5: v1(20.15,39.05) 20.4,39.3 C5.2@21.75,39.3 ; C20.1@47.25,36.95 48.475,36.95 48.825,37.3 v1(48.825,37.75) ; C19.1@47.25,39.3 v1(48.8,39.3)
  Top Layer w0.9: v1(53.925,68.875) 54.425,68.875 v1(54.8,68.5)
  Top Layer w1: C12.2@17.5,48.05 C11.2@17.5,45.45 v1(20.125,45.45) ; C9.2@22.75,22.7 22.75,23.65 v1(23.25,24.15) ; v1(48,52.85) R3.2@48,54.3 ; C25.1@51.5,45.45 C24.1@51.5,48.05
  Top Layer w1.3: C12.2@17.5,48.05 v1(20.125,48.05) ; C10.2@17.75,27.05 v1(20.25,27.05) ; v1(22.75,52.85) C21.1@22.75,54.3 ; C18.2@25.5,22.7 v1(25.5,24.15) ; v1(25.5,52.85) C27.1@25.5,54.3 ; v1(28.5,52.85) C28.1@28.5,54.3 ; C17.2@28.75,22.7 v1(28.75,24.15) ; v1(31,52.85) C29.1@31,54.3 ; C16.2@31.5,22.7 v1(31.5,24.15) ; v1(33.3,52.85) C22.1@33.3,54.3 ; C8.2@34,22.7 v1(34,24.15) ; v1(36.25,52.85) C30.1@36.25,54.3 ; C15.2@36.75,22.7 v1(36.75,24.15) ; v1(39,52.85) C31.1@39,54.3 ; C14.2@39.5,22.7 v1(39.5,24.15) ; v1(42,52.85) C32.1@42,54.3 ; C13.2@42.5,22.7 v1(42.5,24.15) ; v1(45,52.85) C23.1@45,54.3 ; C7.2@46,22.7 v1(46,24.15) ; v1(48.825,48.05) C24.1@51.5,48.05 ; v1(49.175,46.3) 50.025,45.45 C25.1@51.5,45.45 ; v1(49.75,27.05) C26.1@51.5,27.05
  Top Layer w1.5: C2.2@29.75,35.25 v1(29.75,37.25) ; v1(29.75,39.25) C3.2@29.75,41.25 ; C4.2@39.75,35.25 v1(39.75,37.25) ; v1(39.75,39.25) C1.2@39.75,41.25
  Bottom Layer w0.2: v1(14.05,9.3) 14.5,9.3 HDR2.1@14.9,9.7 HDR2.1@14.825,9.775 ; HDR1.1@14.9,60.5 14.9,58.45 v1(14.91,58.191) ; U1.150@17.525,38.25 U1.150@17.55,38.275 ; HDR1.36@28.5,67.3 28.5,68.786 v1(28.956,69.242) ; HDR1.38@29.3,67.3 29.3,68.898 v1(28.956,69.242) ; HDR1.40@30.1,67.3 30.1,69.114 v1(29.972,69.242) v1(28.956,69.242) ; HDR1.98@53.3,67.3 53.3,68.25 v1(53.925,68.875)
  Bottom Layer w0.25: HDR2.98@53.3,16.5 53.3,18.7 53.7,19.1 v1(55,19.1) ; HDR2.100@54.1,16.5 54.1,17.8 54.3,18 v1(55,18)
  Bottom Layer w0.3: U1.129@17.525,27.75 19.55,27.75 v1(20.25,27.05) ; U1.142@17.525,34.25 19.625,34.25 ; U1.150@17.525,38.25 19.65,38.25 v1(20.15,37.75) ; U1.151@17.525,38.75 19.85,38.75 v1(20.15,39.05) ; U1.171@17.525,48.75 19.425,48.75 v1(20.125,48.05) ; v1(22.75,52.85) 24.25,54.35 U1.190@24.25,55.475 ; v1(23.25,24.15) 24.25,23.15 U1.111@24.25,21.525 ; U1.109@25.25,21.525 25.25,23.9 v1(25.5,24.15) ; U1.192@25.25,55.475 25.25,53.1 v1(25.5,52.85) ; v1(28.5,52.85) 28.75,53.1 U1.199@28.75,55.475 ; U1.102@28.75,21.525 v1(28.75,24.15) ; v1(31,52.85) 31.75,53.6 U1.205@31.75,55.475 ; v1(31.5,24.15) 31.75,23.9 U1.96@31.75,21.525 ; v1(33.3,52.85) 34.25,53.8 U1.210@34.25,55.475 ; v1(34,24.15) 34.25,23.9 U1.91@34.25,21.525 ; U1.89@35.25,21.525 35.25,22.65 v1(36.75,24.15) ; U1.212@35.25,55.475 35.25,53.85 v1(36.25,52.85) ; v1(39,52.85) 39.75,53.6 U1.221@39.75,55.475 ; v1(39.5,24.15) 39.75,23.9 U1.80@39.75,21.525 ; v1(42,52.85) 42.55,52.85 44.25,54.55 U1.230@44.25,55.475 ; v1(42.5,24.15) 42.525,24.15 44.25,22.425 U1.71@44.25,21.525 ; v1(45,52.85) 45.25,53.1 U1.232@45.25,55.475 ; U1.69@45.25,21.525 45.25,22.625 46,23.375 v1(46,24.15) ; v1(48.8,39.3) 48.8,39.05 49.1,38.75 U1.30@51.475,38.75 ; v1(48.825,48.05) 49.881,48.75 U1.10@51.475,48.75 ; v1(48.9,33.75) U1.40@51.475,33.75 ; v1(49.75,27.05) 50.45,27.75 U1.52@51.475,27.75 ; 52.675,37.25 49.325,37.25 v1(48.825,37.75) 49.325,38.25 52.675,38.25
  Bottom Layer w0.5: HDR1.100@54.1,67.3 54.1,67.825 v1(54.8,68.5)
  other v1: 5.207,1.143 62,2.1 34.5,4.4 41.2,5.1 1.143,5.207 32.2,5.2 67.2,6.6 10.3,16.5 62.3,16.6 3.023,29.464 65.927,29.464 57.8,37.7 53.4,37.8 61.4,48.2 3.023,49.784 65.927,49.784 63.1,60.6 10.2,67.2 1.309,70.04 67.1,75.4 6.008,75.819 62.04,75.819
GREEN0: HDR1.10 U1.170 | length 31.7
  Bottom Layer w0.2: U1.170@17.525,48.25 16.225,48.25 15.85,48.625 15.85,49.484 12.45,52.884 12.45,69 13.625,70.175 16.525,70.175 18.1,68.6 HDR1.10@18.1,67.3
GREEN1: HDR1.12 U1.169 | length 33.9
  Bottom Layer w0.2: U1.169@17.525,47.75 16.15,47.75 15.45,48.45 15.45,49.275 12.05,52.675 12.05,69.175 13.475,70.6 16.7,70.6 18.9,68.4 HDR1.12@18.9,67.3
HDRIVE: HDR1.18 U1.166 | length 49.6
  Bottom Layer w0.2: U1.166@17.525,46.25 15.8,46.25 14.25,47.8 14.25,48.778 3.588,59.44 3.588,66.588 6.975,69.975 11.05,69.975 12.875,71.8 18.15,71.8 21.3,68.65 HDR1.18@21.3,67.3
INIT_DONE: R9.2 U1.1 | length 4.3
  Top Layer w0.2: v1(53.467,53.594) 53.34,53.721 53.34,54.483 53.558,54.701 R9.2@54.483,54.701
  Bottom Layer w0.2: U1.1@51.475,53.25 53.123,53.25 v1(53.467,53.594)
IO0: HDR2.7 U1.125 | length 25.8
  Top Layer w0.2: v1(12.217,24.257) 12.116,24.155 12.116,16.884 17.3,11.7 v1(17.3,8.15)
  Bottom Layer w0.2: v1(12.217,24.257) 14.641,24.257 16.134,25.75 U1.125@17.525,25.75 ; v1(17.3,8.15) HDR2.7@17.3,9.7
IO1: HDR2.9 U1.126 | length 28.1
  Top Layer w0.2: v1(12.7,25.248) 12.979,24.968 12.979,23.927 12.522,23.47 12.522,17.043 18.1,11.466 v1(18.1,7.375)
  Bottom Layer w0.2: v1(12.7,25.248) 15.066,25.248 16.069,26.25 U1.126@17.525,26.25 ; v1(18.1,7.375) HDR2.9@18.1,9.7
IO2: HDR2.11 U1.127 | length 26.8
  Top Layer w0.2: v1(13.284,26.187) 13.462,26.01 13.462,23.825 12.932,23.296 12.932,17.211 18.9,11.243 v1(18.9,8.15)
  Bottom Layer w0.2: v1(13.284,26.187) 15.44,26.187 16.003,26.75 U1.127@17.525,26.75 ; v1(18.9,8.15) HDR2.11@18.9,9.7
IO3: HDR2.13 U1.128 | length 30.9
  Top Layer w0.2: v1(12.725,27.254) 13.31,27.254 14.046,26.518 14.046,23.844 13.335,23.133 13.335,17.374 19.7,11.009 v1@19.7,7.3
  Bottom Layer w0.2: v1(12.725,27.254) 17.521,27.254 U1.128@17.525,27.25 ; v1(19.7,7.375) HDR2.13@19.7,9.7
IO4: HDR2.15 U1.131 | length 29.4
  Top Layer w0.2: v1(13.462,28.092) 14.453,27.102 14.453,23.673 13.741,22.962 13.741,17.551 20.5,10.793 v1(20.5,8.15)
  Bottom Layer w0.2: v1(13.462,28.092) 14.402,28.092 15.059,28.75 U1.131@17.525,28.75 ; v1@20.5,8.175 v1(20.5,8.15) HDR2.15@20.5,9.7
IO5: HDR2.17 U1.132 | length 30.9
  Top Layer w0.2: v1(14.173,28.981) 14.859,28.296 14.859,23.514 14.148,22.802 14.148,17.755 21.311,10.592 v1(21.3,7.375)
  Bottom Layer w0.2: v1(14.173,28.981) 14.442,29.25 U1.132@17.525,29.25 ; v1(21.3,7.375) HDR2.17@21.3,9.7
IO6: HDR2.19 U1.133 | length 40.9
  Bottom Layer w0.2: U1.133@17.525,29.75 13.163,29.75 11.45,28.037 11.45,23.774 13.25,21.974 13.25,11.509 12.4,10.659 12.4,8.441 13.398,7.442 16.328,7.442 17.17,6.6 21.8,6.6 22.1,6.9 HDR2.19@22.1,9.7
IO7: HDR2.21 U1.134 | length 43.5
  Bottom Layer w0.2: U1.134@17.525,30.25 13.097,30.25 11.05,28.203 11.05,23.609 12.85,21.809 12.85,11.675 12,10.825 12,8.275 13.233,7.042 16.148,7.042 16.99,6.2 22.659,6.2 22.9,6.441 HDR2.21@22.9,9.7
IO8: HDR2.23 U1.135 | length 45.8
  Bottom Layer w0.2: U1.135@17.525,30.75 13.031,30.75 10.65,28.369 10.65,23.443 12.45,21.643 12.45,11.84 11.6,10.99 11.6,8.106 13.064,6.642 15.964,6.642 16.806,5.8 22.985,5.8 23.7,6.515 HDR2.23@23.7,9.7
IO9: HDR2.25 U1.136 | length 48
  Bottom Layer w0.2: U1.136@17.525,31.25 12.966,31.25 10.25,28.534 10.25,23.277 12.05,21.477 12.05,12.006 11.2,11.156 11.2,7.941 12.898,6.242 15.78,6.242 16.622,5.4 23.15,5.4 24.5,6.75 HDR2.25@24.5,9.7
IO10: HDR2.27 U1.137 | length 50.1
  Bottom Layer w0.2: U1.137@17.525,31.75 12.9,31.75 9.85,28.7 9.85,23.112 11.65,21.312 11.65,12.172 10.8,11.322 10.8,7.775 12.733,5.842 15.57,5.842 16.412,5 23.316,5 25.3,6.984 HDR2.27@25.3,9.7
IO11: HDR2.29 U1.138 | length 58.2
  Bottom Layer w0.2: U1.138@17.525,32.25 12.794,32.25 9.449,28.905 9.449,21.157 4.7,16.408 4.7,8.814 8.072,5.442 15.386,5.442 16.228,4.6 23.482,4.6 26.1,7.218 HDR2.29@26.1,9.7
IO12: HDR2.31 U1.139 | length 60.5
  Bottom Layer w0.2: U1.139@17.525,32.75 12.684,32.75 9.042,29.108 9.042,21.316 4.3,16.574 4.3,8.629 7.886,5.042 15.202,5.042 16.044,4.2 23.647,4.2 26.9,7.453 HDR2.31@26.9,9.7
IO13: HDR2.33 U1.140 | length 62.7
  Bottom Layer w0.2: U1.140@17.525,33.25 12.6,33.25 8.636,29.286 8.636,21.476 3.9,16.74 3.9,8.444 7.702,4.642 15.017,4.642 15.86,3.8 23.813,3.8 27.7,7.687 HDR2.33@27.7,9.7
IO14: HDR2.35 U1.141 | length 64.9
  Bottom Layer w0.2: U1.141@17.525,33.75 12.516,33.75 8.23,29.464 8.23,21.635 3.5,16.905 3.5,8.26 7.518,4.242 14.852,4.242 15.694,3.4 23.979,3.4 28.5,7.921 HDR2.35@28.5,9.7
IO15: HDR2.37 U1.143 | length 67.3
  Bottom Layer w0.2: U1.143@17.525,34.75 16.775,34.75 16.175,34.15 12.331,34.15 7.823,29.642 7.823,21.794 3.1,17.071 3.1,8.076 7.334,3.842 14.675,3.842 15.517,3 24.144,3 29.3,8.156 HDR2.37@29.3,9.7
IO16: HDR2.39 U1.144 | length 69.5
  Bottom Layer w0.2: U1.144@17.525,35.25 16.466,35.25 15.766,34.55 12.147,34.55 7.417,29.82 7.417,21.954 2.7,17.237 2.7,7.892 7.163,3.429 14.522,3.429 15.351,2.6 24.31,2.6 30.1,8.39 HDR2.39@30.1,9.7
IO17: HDR2.41 U1.156 | length 76.5
  Bottom Layer w0.2: U1.156@17.525,41.25 14.224,41.25 10.516,37.541 10.516,33.484 7.01,29.979 7.01,22.113 2.3,17.403 2.3,7.708 6.979,3.029 14.345,3.029 15.174,2.2 24.577,2.2 30.9,8.523 HDR2.41@30.9,9.7
IO18: HDR2.43 U1.158 | length 79
  Bottom Layer w0.2: U1.158@17.525,42.25 14.64,42.25 10.109,37.719 10.109,33.643 6.604,30.138 6.604,22.272 1.9,17.568 1.9,7.523 6.807,2.616 14.192,2.616 15.008,1.8 24.99,1.8 31.7,8.51 HDR2.43@31.7,9.7